# Altium PCB TIDA_010057.PcbDoc (part 5 of 9)
Units mil, origin at the board's own origin, x right, y up, seen from the top; angles counter-clockwise.
Board outline 1771.65 x 3543.31 mil, 12 copper layers (Top Layer, GND1, Signal Layer 1, GND2, POWER1, POWER2, GND4, POWER3, GND6, Signal Layer 2, GND7, Bottom Layer), stack 62.79 mil thick; 593 components, 374 nets, 1805 pads, 1029 vias.
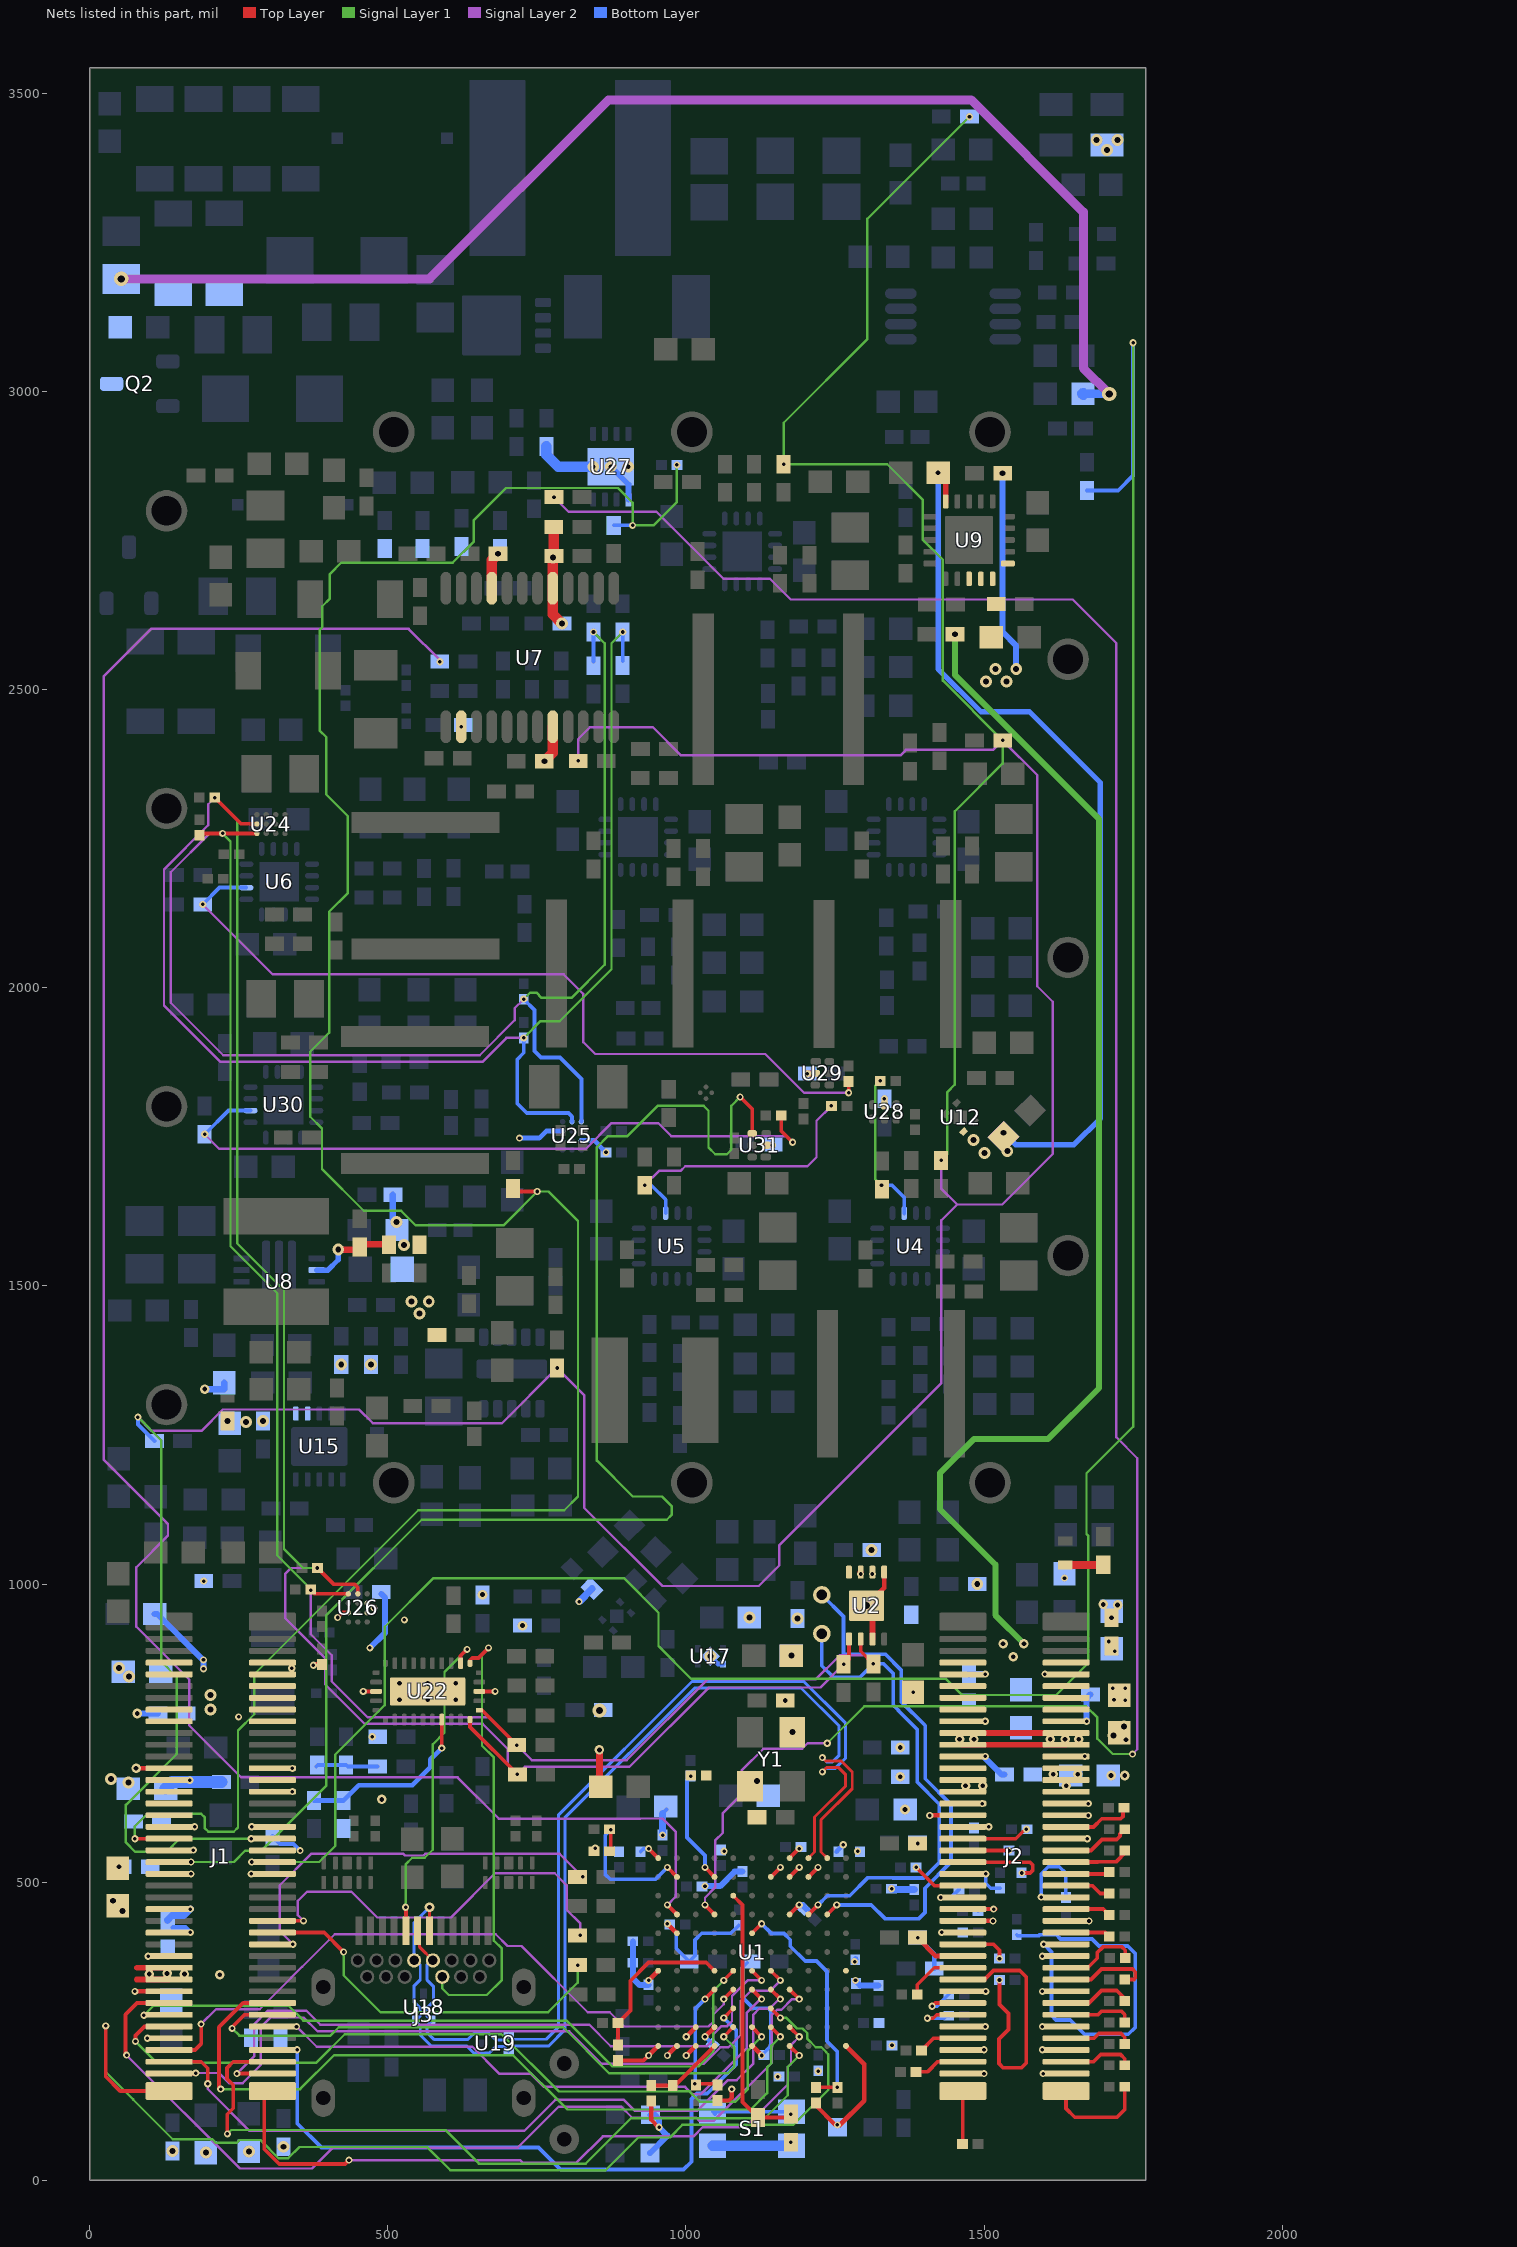
[diagram p13: the nets of this part, all layers, seen from the top]

## Via types
v1: diameter 12, hole 6, Top Layer to Bottom Layer, tented both sides, 424 vias
v2: diameter 20, hole 10, Top Layer to Bottom Layer, tented both sides, 401 vias
v3: diameter 16, hole 8, Top Layer to Bottom Layer, tented both sides, 96 vias
v4: diameter 24, hole 12, Top Layer to Bottom Layer, tented both sides, 28 vias
v5: diameter 20, hole 10, Top Layer to Bottom Layer, 28 vias
v6: diameter 40, hole 20, Top Layer to Bottom Layer, tented both sides, 23 vias
v7: diameter 19.68, hole 7.87, Top Layer to Bottom Layer, 17 vias
v8: diameter 19.68, hole 7.87, Top Layer to Bottom Layer, tented both sides, 10 vias
v9: diameter 32, hole 16, Top Layer to Bottom Layer, tented both sides, 1 vias
v10: diameter 13, hole 6, Top Layer to Bottom Layer, tented both sides, 1 vias

## Nets (pads, with @x,y where several pads share a name; then routed paths per layer and width w, separated by ;. In a path a pad name is that pad's centre, name@x,y a point inside that pad or via, vN(x,y) a via of type N, cw(c..) or ccw(c..) an arc to the next point about the centre after c; other vN are vias at no path point) (continued)
ADDR: (continued)
  Top Layer w6.25: v1(590.62,725) U22.22@590.62,772.76
  Bottom Layer w8: R180.1@376,637.27 R182.1@426,637.27 451.44,662.71 541.36,662.71 571.48,692.83 571.48,705.86 v1(590.62,725)
"ALTERNATE HV INPUT": C122.1 C178.1 R67.1 R71.1 R136.2 U15.1 U15.2
  other v2: 262.2,1272 231,1273.38 291,1273.62 553,1454 540,1474 568.8,1474 1706,3405 1689,3422 1724,3422
AVSS: C29.2 C38.1 C92.1 C93.1 C151.1 C180.1 C185.2 C211.1 C212.1 C213.1 J1.55 J1.56 J1.63 J1.64 J1.65 J1.66 J1.71 J1.72 J1.73 J1.74 J2.49 J2.50 J2.57 J2.58 J2.63 J2.64 J2.69 J2.70 J2.71 J2.72 J2.73 J2.74 L36.2 L37.2 | length 444.5
  Top Layer w8: v3(78,691) 78.18,691.18 J1.55@133.37,691.18
  Bottom Layer w10: v3(80,783) C151.1@114.76,783 ; C38.1@108.99,950 113,950 190,873 v1(191,873) v1(191,858) ; v1(470,893) 470.32,893 495.2,917.88 495.2,977.67 C185.2@489.12,983.75 ; C93.1@1475,848.24 1475.76,849 v1(1502,849) ; v1(1502,711) 1502,708 1529,681 C92.1@1534.38,681 ; v1(1672,770) 1672,808.62 C213.1@1678.38,815
  other v1: 1497,632 1675,632 340,691 1669,711 1502,770 249.97,777.26 1602,849 339,859 1719.38,887.25 1709.51,903.78 191.38,1005 1635,1010
  other v2: 65,667 36,673
CC1: J3.A5 U22.2 | length 556.2
  Top Layer w6.25: J3.A5@530.47,418.54 v1@530.47,459.53 ; U22.2@622.12,867.24 622.12,879.68 v1(633,890.56)
  Signal Layer 1 w4: v1(530,458) 530,530 541.2,541.2 562,541.2 575.42,554.62 575.42,731.3 595.2,751.08 595.2,852.76 v1(633,890.56)
CC2: J3.B5 U22.1 | length 754.2
  Top Layer w6.25: U22.1@637.87,867.24 637.87,872.34 641.63,876.1 652.1,876.1 v1(669,893)
  Signal Layer 1 w4: J3.B5@591.5,341.37 591.5,321.71 602.21,311 666,311 691.34,336.34 691.34,388.66 678,402 678,709 658,729 658,882 v1(669,893)
CDCE_S0: R81.1 U1.D2 | length 3524.8
  Top Layer w6.25: v1(969,462.01) U1.D2@985.02,445.99
  Signal Layer 2 w4: v1(587.38,2547) 587.38,2549.62 535,2602 103,2602 24,2523 24,1208.34 131.43,1100.92 131.43,1081.36 78.2,1028.13 78.2,928.8 167,840 167,763 254.2,675.8 617.2,675.8 686.2,606.8 923.8,606.8 924,607 960.8,607 982.8,585 982.8,475.81 v1(969,462.01)
CDCE_VCTRL: R154.1 U1.D4 | length 3953.1
  Top Layer w6.25: v1(1031.99,462.01) U1.D4@1048.01,445.99
  Signal Layer 1 w4: v1(1237,733) 1299,795 1671.5,795 1690.2,776.3 1690.2,740.8 1716,715 v1(1749,715)
  Signal Layer 2 w4: v1(778.76,2823) 803.39,2798.37 950.63,2798.37 1063,2686 1141,2686 1175.8,2651.2 1648.8,2651.2 1722,2578 1722,1246.2 1757,1211.2 1757,723 v1(1749,715) ; v1(1031.99,462.01) 1031.99,473.99 1049,491 1049,570 1062,583 1062,616 1094,648 1094,688 1130,724 1195,724 1204,733 v1(1237,733)
CLKIN_FX3: J1.30 R10.1 | length 697
  Top Layer w6.25: J1.30@306.6,435.27 v1(358.73,435.27)
  Signal Layer 2 w4: v1(358.73,435.27) 349.34,444.66 349.34,468.83 364.6,484.09 439.2,484.09 482.5,440.8 605.8,440.8 680,515 780,515 800,495 800,454 823,431 v1(823,411)
DC_DC_CLK1: C78.2 J1.43 R75.2 R120.2 | length 4117.8
  Top Layer w6.25: v1(76,573) 133.3,573 J1.43@133.37,573.07 ; R120.2@709.88,1663.4 714.83,1658.45 v1(750.77,1658.45)
  Signal Layer 1 w4: v1(76,573) 76,594 97,615 187,615 192.8,609.2 192.8,591.2 199.2,584.8 241.8,584.8 248.8,591.8 248.8,754.59 276,781.79 276,848.85 551.15,1124 796,1124 819,1147 819,1609.15 769.7,1658.45 v1(750.77,1658.45) 694,1601.68 546.97,1601.68 522.45,1626.2 459.8,1626.2 389.8,1696.2 389.8,1764 370,1783.8 370,1893 402,1925 402,2128 433.2,2159.2 433.2,2287.8 396.8,2324.2 396.8,2420.5 385.8,2431.5 385.8,2600 390.2,2604.4 390.2,2640.04 403,2652.84 403,2694 421.8,2712.8 608.8,2712.8 644,2748 644,2783.84 698.36,2838.2 886.02,2838.2 910.62,2813.6 v1(910.62,2775.62) 945.62,2775.62 984.99,2814.99 v1(984.99,2877)
  Bottom Layer w6.25: R75.2@879,2775.62 v1(910.62,2775.62)
DIR: R147.1 R148.2 R174.1 | length 105.3
  Bottom Layer w6.25: R174.1@379.91,694.2 382.47,696.76 R147.1@430,696.76 432.76,694 R148.2@483,694
DM: J3.A7 J3.B7 U1.A10 U18.2 U19.2 | length 1810.7
  Top Layer w5: J3.A7@569.84,418.54 569.84,457.84 v3(570,458) ; v1(1229,709) 1234.95,703.05 1260.95,703.05 1279,685 1279,657 1226.74,604.74 1226.74,550.73 U1.A10@1236.98,540.48
  Bottom Layer w5: v3(570,458) 544.25,432.25 J3.B7@544.25,368.93 546.57,368.93 554.5,361 554.5,336.57 543.63,325.7 543.63,299.58 554.5,288.7 554.5,275.64 U18.2@546.22,267.36 554.5,259.08 554.5,243.94 573.44,225 632.93,225 644.3,213.63 670.42,213.63 681.3,224.5 694.36,224.5 U19.2@702.64,216.22 712.12,225.7 770.26,225.7 797,252.44 797,608 1014.8,825.8 1193.2,825.8 1257,762 1257,713 1246,702 1236,702 v1(1229,709)
DP: J3.A6 J3.B6 U1.A9 U18.1 U19.1 | length 1730.2
  Top Layer w5: J3.A6@550.16,418.54 553.56,415.13 553.56,391.11 J3.B6@575.75,368.93 ; U1.A9@1205.49,540.48 1215.74,550.73 1215.74,609.29 1268,661.56 1268,680.44 1256.39,692.05 1235.93,692.05 v1(1229,685.12)
  Bottom Layer w5: J3.B6@575.75,368.93 573.43,368.93 565.5,361 565.5,336.57 576.37,325.7 576.37,299.58 565.5,288.7 565.5,275.64 U18.1@573.78,267.36 565.5,259.08 565.5,248.5 578,236 633.93,236 644.3,246.37 670.42,246.37 681.3,235.5 694.36,235.5 U19.1@702.64,243.78 709.72,236.7 765.7,236.7 786,257 786,612.56 1010.24,836.8 1197.76,836.8 1263.8,770.76 1268,766.56 1268,708.44 1250.56,691 1235,691 1229.12,685.12 v1(1229,685.12)
FPGA_PG_1V: R95.1 R124.2 U30.14 | length 1173.6
  Top Layer w6.25: R95.1@1160,1786 1160,1760 v1(1179,1741)
  Signal Layer 2 w4: v1(193,1754.38) 217.38,1730 832,1730 875.2,1773.2 953.66,1773.2 975.66,1751.2 1168.8,1751.2 v1(1179,1741)
  Bottom Layer w6.25: v1(193,1754.38) 232.78,1794.16 U30.14@269.88,1794.16
FPGA_PG_2V5: R66.2 R234.1 U6.14 | length 1365.5
  Top Layer w6.25: v1(1273,1824) R234.1@1273,1843.01
  Signal Layer 2 w4: v1(189.62,2140) 306.82,2022.8 795,2022.8 828,1989.8 828,1909 848,1889 1133,1889 1198,1824 v1(1273,1824)
  Bottom Layer w6.25: v1(189.62,2140) 217.78,2168.16 U6.14@262.88,2168.16
FX3_A0: J1.7 U1.H5 | length 1147.9
  Top Layer w6.25: J1.7@133.37,218.73 176.79,218.73 187,228.95 v1(187,262) ; v1(1063.49,303.99) U1.H5@1079.5,320.01
  Signal Layer 2 w4: v1(187,262) 212,287 285.32,287 338.2,339.88 338.2,340.2 356.4,358.4 356.57,358.4 410.97,412.8 681.2,412.8 701,393 724.5,393 835.5,282 872.41,282 896.41,258 1038,258 1045.79,265.79 1045.79,277.79 1063.49,295.49 v1(1063.49,303.99)
FX3_A1: J1.8 U1.J5 | length 1135.8
  Top Layer w6.25: v1(1063.49,272.5) U1.J5@1079.5,288.51
  Bottom Layer w6.25: v1(348,219) 348,96 389,55 752.97,55 789.85,18.12 996.12,18.12 1009.33,31.33 1009.33,136.33 1018.67,145.67 1035.67,145.67 1084.66,194.66 1084.66,251.32 v1(1063.49,272.5)
FX3_CLK: J2.46 R199.2 | length 116.3
  Top Layer w6.25: J2.46@1637.65,592.75 1683.53,592.75 1697.39,606.61 1729.36,606.61 1732.99,610.24 R199.2@1732.99,624
FX3_CTL15: J1.6 U1.L8 | length 1310
  Top Layer w6.25: v1(231,78) 231,111 241,121 241,160 230.45,170.55 230.45,188.45 241.05,199.05 J1.6@306.6,199.05 ; U1.L8@1173.99,225.52 v1(1190.01,209.5)
  Signal Layer 1 w4: v1(231,78) 237.42,84.42 596.58,84.42 652.8,28.2 832,28.2 908,104.2 1132.2,104.2 1170.8,142.8 1170.8,190.3 v1(1190.01,209.5)
FX3_D0: J2.1 R122.2 | length 89
  Top Layer w6.25: R122.2@1464.01,61 1464.43,61.42 J2.1@1464.43,149.84
FX3_D1: J2.2 R192.2 | length 177.2
  Top Layer w6.25: J2.2@1637.65,149.84 1637.65,120.35 1652,106 1723,106 1736,119 R192.2@1736,157
FX3_D2: J2.5 R117.2 | length 85.5
  Top Layer w6.25: R117.2@1385.99,182 1405,182 1422.05,199.05 J2.5@1464.43,199.05
FX3_D3: J2.6 R169.2 | length 117.2
  Top Layer w6.25: J2.6@1637.65,199.05 1683.77,199.05 1695.72,211 1729,211 1735.99,204.01 R169.2@1736,193
FX3_D4: J2.9 R130.2 | length 77.9
  Top Layer w6.25: R130.2@1394.99,218 1415.41,238.42 J2.9@1464.43,238.42
FX3_D5: J2.10 R194.2 | length 115.3
  Top Layer w6.25: J2.10@1637.65,238.42 1684.42,238.42 1692.39,246.39 1729.61,246.39 1735.99,240.01 R194.2@1735.99,229
FX3_D6: J2.13 R155.2 | length 101
  Top Layer w6.25: v1(1405,272) 1415,272 1420.79,277.79 J2.13@1464.43,277.79
  Bottom Layer w6.25: v1(1405,272) 1433.43,272 1439.22,277.79 R155.2@1441.01,276
FX3_D7: J2.14 R193.2 | length 116.1
  Top Layer w6.25: J2.14@1637.65,277.79 1691.36,277.79 1697.17,283.61 1730.39,283.61 1735.99,278.01 R193.2@1735.99,265
FX3_D8: J2.15 R150.2 | length 90
  Top Layer w6.25: v1(1413,292) 1418.47,297.47 J2.15@1464.43,297.47
  Bottom Layer w6.25: v1(1413,292) 1421.01,292 R150.2@1441.01,312
FX3_D9: J2.16 R196.2 | length 116.5
  Top Layer w6.25: J2.16@1637.65,297.47 1676.26,297.47 1697.17,318.39 1722.56,318.39 1735.99,304.96 R196.2@1735.99,301
FX3_D10: J2.19 R149.2 | length 467.8
  Top Layer w6.25: J2.19@1464.43,336.84 1500.84,336.84 1516,352 1560,352 1571,341 1571,197 1563,189 1531.8,189 1525,195.8 1525,237 1541,253 1541,280 1526.01,294.99 v1(1526.01,336) v1@1525.16,336.84
FX3_D11: J2.20 R197.2 | length 154.3
  Top Layer w6.25: J2.20@1637.65,336.84 1679.63,336.84 1697.17,354.39 1749.14,354.39 1753.53,350 1753.53,339 1751.53,337 R197.2@1735.99,337
FX3_D12: J2.21 R189.2 | length 104.2
  Top Layer w6.25: R189.2@1388,312 1388,328 1416.53,356.53 J2.21@1464.43,356.53
FX3_D13: J2.22 R125.2 | length 134.9
  Top Layer w6.25: J2.22@1637.65,356.53 1674.01,356.53 1690,372.52 1690,382.22 1699.39,391.61 1731.39,391.61 1736.99,386.01 R125.2@1736.99,373
FX3_D14: J2.25 R156.2 | length 79.6
  Top Layer w6.25: J2.25@1464.43,395.9 1516,395.9 1526.01,385.89 v1(1526.01,372)
FX3_D15: J2.26 R243.2 | length 658
  Top Layer w6.25: v1(1600,396) 1600.1,395.9 J2.26@1637.65,395.9 J2.26@1637.55,396
  Bottom Layer w6.25: R243.2@1555,412.01 1556.93,410.08 1591.18,410.08 1593.11,412.01 1620.99,412.01 1628.05,404.95 1681.05,404.95 1693,393 1741,393 1753.53,380.47 1753.53,256.53 1742,245 1668.6,245 1644.7,268.9 1620.9,268.9 1613,276.8 1613,383 v1(1600,396)
FX3_D16: J2.27 R198.2 | length 76.2
  Top Layer w6.25: v1(1429,416) 1428,416 1427.58,415.58 J2.27@1464.43,415.58 J2.27@1464.84,416
  Bottom Layer w6.25: v1@1427.58,415.58 1428,416 v1(1429,416) 1429.42,415.58 R198.2@1464.43,415.58
FX3_D17: J2.28 R244.2 | length 75.1
  Top Layer w6.25: J2.28@1637.65,415.58 1703.42,415.58 R244.2@1710.01,409
FX3_D18: J2.31 R228.2 | length 81.9
  Top Layer w6.25: J2.31@1464.43,454.95 v1(1516,454.95) v1@1519.08,454.95
  Bottom Layer w6.25: R228.2@1489.99,452 1492.95,454.95 v1(1516,454.95)
FX3_D19: J2.32 R227.2 | length 76.5
  Top Layer w6.25: J2.32@1637.65,454.95 1700.05,454.95 R227.2@1710.01,445
FX3_D20: J2.33 R224.2 | length 36.3
  Bottom Layer w6.25: v1(1427.36,474.36) 1444.37,474.36 R224.2@1458.01,488
FX3_D21: J2.34 R217.2 | length 171.8
  Top Layer w6.25: v1(1596,475) 1637.29,475 J2.34@1637.65,474.64
  Bottom Layer w6.25: v1(1596,475) 1596,514 1607.86,525.86 1626.14,525.86 1637.29,514.71 1637.29,475 R217.2@1637.65,474.64
FX3_D22: J2.35 R220.2 | length 91.1
  Top Layer w6.25: v1(1385.99,525) 1416.67,494.33 J2.35@1464.43,494.33
FX3_D23: J2.36 R216.2 | length 77.9
  Top Layer w6.25: J2.36@1637.65,494.33 1681.67,494.33 1695,481 R216.2@1710.01,481
FX3_D24: J2.37 R223.2 | length 43.2
  Bottom Layer w6.25: v1(1503,514) 1503,498.17 1511.16,490.01 R223.2@1527,490.01
FX3_D25: J2.38 R218.2 | length 73.6
  Top Layer w6.25: J2.38@1637.65,514.01 1707.02,514.01 R218.2@1710.01,517
FX3_D26: J2.39 R226.2 | length 148.5
  Top Layer w6.25: J2.39@1464.43,533.7 1577.3,533.7 1581.5,529.5 1581.5,519.5 1577.49,515.49 v1(1563.5,515.49)
FX3_D27: J2.40 R219.2 | length 163.7
  Top Layer w6.25: 1690.7,533.7 J2.40@1637.65,533.7 1637.65,534.19 1721.2,534.19 1738,550.99 R219.2@1735.99,553
FX3_D28: J2.41 R222.2 | length 77.7
  Top Layer w6.25: J2.41@1464.43,553.38 1541.63,553.38 v1(1542.01,553)
FX3_D29: J2.42 R221.2 | length 115.4
  Top Layer w6.25: J2.42@1637.65,553.38 1679.38,553.38 1697.81,571.81 1722.76,571.81 1727.99,577.04 1727.99,581 R221.2@1735.99,589
FX3_D30: J2.43 R225.2 | length 113.2
  Top Layer w6.25: J2.43@1464.43,573.07 1553.06,573.07 1568.99,589 v1(1571,589)
FX3_D31: J2.45 R240.2 | length 69.5
  Top Layer w6.25: J2.45@1464.43,592.75 1507.75,592.75 v1(1508,593)
  Bottom Layer w6.25: R240.2@1483,590.99 1485.01,593 v1(1508,593)
FX3_FLAGA: J1.3 U1.G7 | length 1261.3
  Top Layer w6.25: J1.3@133.37,179.36 177.36,179.36 v1(178,180) ; U1.G7@1142.5,351.5 v1(1158.51,335.49)
  Signal Layer 2 w4: v1(178,180) 217,180 234,163 256.5,163 287,193.5 287,257 303.2,273.2 358.96,273.2 382.16,250 804.2,250 858.5,195.7 1030.17,195.7 1057.77,223.3 1071.3,223.3 1092,244 1092,301 1108.79,317.79 1140.82,317.79 v1(1158.51,335.49)
FX3_FLAGB: J1.4 U1.G6 | length 1194.4
  Top Layer w6.25: v1(247,179) 306.23,179 J1.4@306.6,179.36 v1@250.64,179.36 ; U1.G6@1111,351.5 v1(1127.02,335.49)
  Signal Layer 2 w4: v1(247,179) 275.8,207.8 275.8,261.64 298.56,284.4 363.6,284.4 386.8,261.2 837.8,261.2 874,225 1035.51,225 1045.79,235.28 1045.79,244.79 1059.7,258.7 1069.2,258.7 1077.29,266.78 1077.29,309.29 1103.49,335.49 v1(1127.02,335.49)
FX3_FSLC0: R18.1 R27.2 U1.B2 | length 248.1
  Top Layer w6.25: R27.2@873.99,557 v1(873.99,588) ; v1(969,525) U1.B2@985.02,508.98
  Bottom Layer w6.25: v1(873.99,588) 864.88,578.89 864.88,513.12 873,505 949,505 v1(969,525)
FX3_FSLC1: R19.1 R28.2 U1.B4 | length 190.7
  Top Layer w6.25: v1(1031.99,525) U1.B4@1048.01,508.98
  Bottom Layer w6.25: v1(1008,677.99) 1001.77,671.76 1001.77,575.23 1031.99,545.01 v1(1031.99,525)
FX3_FSLC2: R20.1 R29.2 U1.E6 | length 409.3
  Top Layer w6.25: U1.E6@1111,414.5 v1(1127.02,430.51) ; R29.2@1218,155.99 v1(1254,155.99)
  Bottom Layer w6.25: v1(1127.02,430.51) 1143.51,414.02 1164.62,414.02 1175.08,403.55 1175.08,392.83 1200.01,367.91 1219.09,367.91 1236.68,350.32 1236.68,233.32 1254,216 v1(1254,155.99)
FX3_GPO0: J1.11 U1.K6 | length 1310.4
  Top Layer w6.25: v1(77,233) 77,243 92.1,258.1 J1.11@133.37,258.1 ; U1.K6@1111,257.02 v1(1127.02,241)
  Signal Layer 1 w4: v1(77,233) 113,197 379.8,197 428,245.2 690.8,245.2 787,149 986.5,149 986.71,149.21 1006.29,149.21 1023.5,132 1083,132 1104,153 1104,217.98 v1(1127.02,241)
FX3_GPO1: J1.13 U1.G5 | length 1206.3
  Top Layer w6.25: v1(91,277) 91.79,277.79 J1.13@133.37,277.79 ; v1(1063.49,335.49) U1.G5@1079.5,351.5
  Signal Layer 1 w4: v1(91,277) 107,293 333.5,293 358.5,268 800,268 877,191 1021,191 1045.79,215.79 1045.79,317.79 v1(1063.49,335.49)
FX3_GPO2: J1.12 U1.H6 | length 950.3
  Top Layer w6.25: U1.H6@1111,320.01 v1(1127.02,303.99)
  Signal Layer 2 w4: v1(347,258) 381,224 641.87,224 687.34,178.52 740.07,178.52 761.8,156.8 998.7,156.8 1010.7,144.79 1025.3,144.79 1101.8,221.3 1101.8,280.66 1125.14,303.99 v1(1127.02,303.99)
FX3_GPO3: J1.14 U1.K5 | length 1048.1
  Top Layer w6.25: v1(239,255) 239,257 259.79,277.79 J1.14@306.6,277.79 ; v1(1063.49,241) U1.K5@1079.5,257.02
  Signal Layer 1 w4: v1(239,255) 251.2,242.8 403.8,242.8 417.8,256.8 794.2,256.8 871.2,179.8 1070.8,179.8 1081,190 1081,223.49 v1(1063.49,241)
FX3_I2C_SCL: R12.1 R77.1 R157.1 R177.2 R185.1 R233.1 R237.1 SCL.1 U1.D9 U2.6 U22.26 U24.A1 U25.A1 U26.A1 | length 5702
  Top Layer w6.25: R185.1@184,2256.01 186.99,2259 v1(223,2259) U24.A1@280.5,2259 ; v1(371,990) 377.25,983.75 U26.A1@434,983.75 ; U22.26@653.61,788.5 657.87,788.5 v1(716.38,730) ; U1.D9@1205.49,445.99 v1(1221.5,462.01) ; U2.6@1293.16,907.9 1293.16,887.59 v1(1314.5,866.24)
  Signal Layer 1 w4: v1(223,2259) 236.3,2245.7 236.3,1566.7 314.8,1488.2 314.8,1048.2 371,992 v1(371,990) ; v1(728,1981.01) 738.99,1992 749.2,1992 758,1983.2 808.2,1983.2 864,2039 864,2577.76 v1(845,2596.76)
  Signal Layer 2 w4: v1(223,2259) 201,2259 136,2194 136,1975 224,1887 654.16,1887 712.8,1945.64 712.8,1965.81 v1(728,1981.01) ; v1(371,990) 371,915.87 406.2,880.64 406.2,836.8 466.15,776.85 669.52,776.85 v1(716.38,730) 741.58,704.8 900.8,704.8 1036,840 1217.38,840 1258.2,880.82 1299.92,880.82 v1(1314.5,866.24)
  Bottom Layer w6.25: v1(728,1981.01) 746,1963.01 746,1894 757,1883 789,1883 824.75,1847.25 U25.A1@824.75,1775.5 ; R157.1@845,2547.24 v1(845,2596.76) ; v1(1221.5,462.01) 1236.98,477.49 1274.86,477.49 1304.69,507.32 1346.76,507.32 1346.97,507.11 1399.03,507.11 1425.05,533.13 1425.05,630.95 1388,668 1388,756.27 1356.14,788.14 ; SCL.1@1228,917 1228,863 1247,844 1292.26,844 v1(1314.5,866.24) 1331.76,866.24 1347.55,850.45 1347.55,797.54 1356.54,788.54
FX3_I2C_SDA: R13.1 R78.1 R158.1 R178.2 R186.1 R232.1 R236.1 SDA.1 U1.D10 U2.5 U22.25 U24.A2 U25.A2 U26.A2 | length 5992.6
  Top Layer w6.25: v1(210,2319) 253.67,2275.32 279.93,2275.32 U24.A2@280.5,2274.75 U24.A2@280.5,2275.32 ; v1(382,1027) 409,1000 444,1000 449.75,994.25 U26.A2@449.75,983.75 ; U22.25@637.87,772.76 637.87,760.51 v1(717.38,681) ; U1.D10@1236.98,445.99 v1(1253,462.01) ; v1(1264.5,865.62) 1273.47,874.59 U2.5@1273.47,907.9
  Signal Layer 1 w4: v1(210,2319) 247.5,2281.5 247.5,1571.34 326,1492.84 326,1059 358,1027 v1(382,1027) ; v1(728,1916) 756.2,1944.2 788.35,1944.2 875.2,2031.05 875.2,2577.96 v1(894,2596.76)
  Signal Layer 2 w4: v1(210,2319) 199,2308 199,2272.84 124.8,2198.64 124.8,1970.36 219.36,1875.8 658.8,1875.8 699,1916 v1(728,1916) ; v1(382,1027) 338,1027 327.8,1016.8 327.8,943.2 395,876 395,832.16 461.51,765.65 659.23,765.65 701,723.88 701,697.38 v1(717.38,681) 729.98,693.6 905.44,693.6 1038.49,826.65 1225.53,826.65 v1(1264.5,865.62)
  Bottom Layer w6.25: v1(728,1916) 728,1891 717,1880 717,1806 733,1790 803,1790 809,1784 U25.A2@809,1775.5 ; R158.1@894,2547.62 v1(894,2596.76) ; SDA.1@1228,982 1264.5,945.5 1264.5,881 ; v1(1253,462.01) 1310.99,462.01 1334,439 1390.93,439 1401,449.07 1401,490.05 1444.74,533.79 1444.74,630.28 1401.45,673.57 1401.45,762.66 1361,803.11 1361,856.02 1334.45,882.57 1266.07,882.57 1264.5,881 ; v1(1264.5,865.62) 1264.5,881
FX3_INITB: J1.28 R16.2 | length 640
  Top Layer w6.25: J1.28@306.6,415.58 393.42,415.58 v1(426,383)
  Signal Layer 1 w4: v1(426,383) 426,344 488,282 769,282 818.38,331.38 v1(818.38,361)
FX3_PG_1V2: R46.2 R167.1 U4.14 | length 256.1
  Signal Layer 1 w4: v1(1326.01,1844) 1317.8,1835.79 1317.8,1679.08 v1(1328,1668.88)
  Bottom Layer w6.25: v1(1328,1668.88) 1345.62,1668.88 1366.16,1648.35 U4.14@1366.16,1622.12 U4.14@1366.16,1621.62
FX3_PG_1V8: R53.2 R172.1 U5.14 | length 471.8
  Signal Layer 2 w4: v1(931,1668.88) 955.12,1693 990.87,1693 998.8,1700.93 1203.93,1700.93 1219,1716 1219,1777 v1(1244,1802)
  Bottom Layer w6.25: v1(931,1668.88) 941.88,1668.88 942,1669 966.16,1644.84 U5.14@966.16,1622.12
FX3_PKTEND: J1.15 U1.H8 | length 1563.9
  Top Layer w6.25: v1(62,210) 60,212 60,278 79.47,297.47 J1.15@133.37,297.47 ; U1.H8@1173.99,320.01 v1(1190.01,303.99)
  Signal Layer 2 w4: v1(62,210) 252,20 373,20 408,55 718,55 786.8,123.8 891.36,123.8 910.16,105 1017.4,105 1022.2,100.2 1047.08,100.2 1144,197.12 1144,277.5 1152.8,286.3 1160.33,286.3 1178.03,303.99 v1(1190.01,303.99)
FX3_PMODE0: R21.1 R30.2 U1.G4 | length 276.1
  Top Layer w6.25: R30.2@886,226.99 R21.1@885.99,264 907,285.01 907,334.98 937.37,365.35 959.26,365.35 959.31,365.3 979.23,365.3 979.28,365.35 990.75,365.35 990.8,365.3 1010.73,365.3 1010.78,365.35 1034.16,365.35 U1.G4@1048.01,351.5
FX3_PMODE1: R22.1 R31.2 U1.H4 | length 211.5
  Top Layer w6.25: v1(1015,162) 1050.99,162 R31.2@1053,159.99 ; v1(1031.99,303.99) U1.H4@1048.01,320.01
  Bottom Layer w6.25: v1(1015,162) 1015.48,161.51 1015.5,287.5 v1(1031.99,303.99)
FX3_PMODE2: R23.1 R32.2 U1.L4 | length 133.2
  Top Layer w6.25: R32.2@942,158.99 R23.1@978,158.99 ; R23.1@978,159.99 982.48,159.99 U1.L4@1048.01,225.52
FX3_PRGB: J1.26 R24.2 | length 656.6
  Signal Layer 2 w4: v1(341,396) 318.8,418.2 318.8,495.06 371.37,547.64 526.21,547.64 529.05,544.8 559.95,544.8 562.79,547.64 788.36,547.64 v1(827,509)
FX3_RST: C3.1 R8.1 S1.2 S1.4 U1.C5 | length 576.6
  Top Layer w6.25: U1.C5@1079.5,477.49 1095,461.99 1095,131.38 R8.1@1121,105.38 C3.1@1170.16,105.38
  Bottom Layer w6.25: S1.2@1048.92,111.17 S1.2@1045,115.09 1172.02,115.09 v10(1175.94,111.17)
FX3_SLCS: J1.2 U1.K8 | length 1160.7
  Top Layer w6.25: J1.2@306.6,149.84 292.91,136.15 292.91,52.47 317.86,27.53 428.53,27.53 v1(435,34) ; U1.K8@1173.99,257.02 v1(1190.01,241)
  Signal Layer 2 w4: v1(435,34) 721.8,34 726,29.8 816.8,29.8 860.8,73.8 1012.8,73.8 1028,89 1099,89 1170.8,160.8 1170.8,189.8 1176.21,195.21 1176.21,227.2 v1(1190.01,241)
FX3_SLOE: J1.1 U1.J7 | length 1828.4
  Top Layer w6.25: v1(27,259) 27,174 51.16,149.84 J1.1@133.37,149.84 ; U1.J7@1142.5,288.51 v1(1158.51,272.5)
  Signal Layer 1 w4: v1(27,259) 27,182 73.2,135.8 73.2,135.27 139.47,69 206,69 212.2,62.8 246.8,62.8 251.7,67.7 286.52,67.7 317.05,37.18 332.95,37.18 351.77,56 566,56 605,17 865,17 920,72 973.5,72 984.2,82.7 984.2,83.2 994,93 1179.98,93 1238.8,151.82 1238.8,210.94 1239,211.14 1235.3,214.84 1235.3,215.22 1227.22,223.3 1217.7,223.3 1203.81,237.2 1203.81,246.72 1195.72,254.8 1186.21,254.8 1168.51,272.5 v1(1158.51,272.5)
FX3_SLRD: J1.5 U1.H7 | length 1270.8
  Top Layer w6.25: J1.5@133.37,199.05 187.05,199.05 198,188.1 v1(198,162) ; U1.H7@1142.5,320.01 v1(1158.51,303.99)
  Signal Layer 2 w4: v1(198,162) 198,153.34 268.34,83 729,83 781,135 896,135 914,117 1019.5,117 1070.7,168.2 1085.42,168.2 1113.22,196 1113.22,278.21 1123,288 1140.64,288 1156.63,303.99 v1(1158.51,303.99)
FX3_SLWR: J1.16 U1.K7 | length 1327.2
  Top Layer w6.25: v1(220,153) 217,156 217,257.04 257.43,297.47 J1.16@306.6,297.47 ; U1.K7@1142.5,257.02 v1(1158.51,241)
  Signal Layer 1 w4: v1(220,153) 353,153 410,210 710.16,210 801.36,118.8 1108.67,118.8 1136.2,146.33 1136.2,189.32 1143.31,196.43 1143.31,225.8 v1(1158.51,241)
"GLOBAL ENABLE": J1.44 R47.1 R63.1 R92.1 R109.1 R245.1 R246.2 R247.2 | length 7178.2
  Signal Layer 1 w4: v1(81,1280) 120,1241 120,870 146.2,843.8 146.2,715.2 60.8,629.8 60.8,566.7 76.5,551 129,551 151,573 v1(271,573) ; v1(1428,1710.62) 1438.65,1721.27 1438.65,1825.34 1451,1837.69 1451,2295.85 1531.24,2376.09 v1(1531.24,2415) 1431,2515.24 1431,2718 1397,2752 1397,2819 1337.76,2878.24 v1(1164,2878.24) 1164,2947.73 1304.38,3088.11 1304.38,3289.76 v1(1475.62,3461)
  Signal Layer 2 w4: v1(81,1280) 104.04,1256.96 187.43,1256.96 223.29,1292.82 452.03,1292.82 475.05,1269.8 691.42,1269.8 v1(784,1362.38) 829.31,1317.07 829.31,1128.06 960.57,996.8 1122.16,996.8 1156.86,1031.5 1156.86,1065.58 1428.56,1337.27 1428.56,1610.24 1454.98,1636.66 ; v1(819.36,2380.52) 819.36,2417.36 839,2437 944.84,2437 992.04,2389.8 1359.8,2389.8 1369,2399 1515.24,2399 v1(1531.24,2415) 1589.2,2357.04 1589.2,2182.05 1589.13,2181.98 1589.13,2002.58 1615.16,1976.55 1615.16,1721.26 1530.57,1636.66 1454.98,1636.66 ; v1(1428,1710.62) 1428,1663.64 1454.98,1636.66
  Bottom Layer w6.25: v1(81,1280) 81,1267.76 R246.2@108.76,1240
GND_A7: C119.2 C182.1 C183.2 C184.2 D17.2 R139.2 R141.1 R142.1 R165.2 U8.2 | length 241.3
  Top Layer w11: v2(417,1561) 444.38,1561 453,1569.62 501.38,1569.62 C183.2@502,1569
  Bottom Layer w9: U8.2@380.66,1526.69 399.69,1526.69 417,1544 v2(417,1561)
  Bottom Layer w11: v3(193,1327) 226,1327 C119.2@226,1337.5 ; D17.2@508.65,1653 508.65,1612.84 v2(514.5,1607)
  other v2: 422,1368.38 472,1368.38 527,1569
GND_SIG: C1.2 C2.2 C3.2 C4.2 C5.2 C6.2 C7.2 C8.2 C9.2 C10.2 C11.2 C12.2 C13.2 C14.2 C15.2 C16.2 C17.2 C18.2 C19.2 C20.1 C21.1 C40.1 C49.2 C52.1 C53.1 C55.1 C73.2 C74.1 C77.2 C91.1 C112.1 C115.2 C123.1 C133.2 C138.2 C139.1 C140.2 C141.2 C142.2 C143.2 C144.2 C145.2 C146.2 C147.2 C148.2 C149.2 C150.2 C152.2 C154.2 C162.1 C163.1 C164.2 C165.2 C166.2 C167.2 C168.2 C169.2 C170.2 C172.2 C173.2 C174.2 C204.2 C205.2 C209.1 C210.1 C211.2 C212.2 C234.2 C235.2 C236.2 C242.2 D1.2 D2.2 D9.2 J1.9 J1.17 J1.23 J1.27 J1.31 J1.37 J1.38 J1.41 J1.42 J1.45 J1.46 J1.51 J1.52 J1.53 J1.54 J2.3 J2.4 J2.7 J2.8 J2.11 J2.12 J2.17 J2.18 J2.23 J2.24 J2.29 J2.30 J2.44 J2.47 J2.48 L36.1 L37.1 L38.2 L39.2 R1.1 R2.1 R3.1 R4.1 R5.1 R6.1 R7.2 R9.1 R11.1 R27.1 R28.1 R29.1 R30.1 R31.1 R32.1 R162.2 R170.1 R176.2 R182.2 S1.1 S1.3 U1.A1 U1.A8 U1.B7 U1.B8 U1.B9 U1.D8 U1.E2 U1.G1 U1.G11 U1.K3 U1.K4 U1.L1 U1.L2 U1.L3 U1.L6 U1.L11 U2.1 U2.2 U2.3 U2.4 U2.7 U2.9@1303,964 U7.5 U7.9 U7.14 U7.20 U17.2 U17.5 U22.13 U22.28 U22.31 U25.B3 U25.C1 U26.B3 U26.C1 U26.C3 U27.5 U27.9 U28.2 U29.2 U31.2 Y1.2 Y1.4 | length 3335.1
  Top Layer w6: R30.1@886,201.01 929.01,201.01 v1(937.5,209.5)
  Top Layer w7: v1(76,317) 76.16,317.16 J1.17@133.37,317.16 ; J1.45@133.37,592.75 175.75,592.75 v1(176,593) v1@178.5,593 ; J1.53@133.37,671.49 158.51,671.49 J1.53@159,671 ; J1.54@321,671.49 J1.54@321.51,672 ; v1(416,944) 424.25,952.25 U26.C1@434,952.25 ; v1(459,820) U22.13@480.39,820 U22.13@483.39,820 ; U22.28@653.61,820 v1(680,820) ; v1(937.5,556.5) U1.A1@953.52,540.48 ; R32.1@942,133.01 942,101 954,89 v1(955,89) ; R31.1@1053,134.01 1072.01,134.01 1077,139 v1(1077,153) ; U1.B7@1142.5,508.98 v1(1158.51,525) ; U1.D8@1173.99,445.99 v1(1190.01,462.01) ; U1.B8@1173.99,508.98 v1(1190.01,525) ; U1.A8@1173.99,540.48 v1(1190.01,556.5) ; U1.B9@1205.49,508.98 v1(1221.5,525) ; R29.1@1218,130.01 1218,125.47 1250.47,93 v1(1254,93)
  Top Layer w8: v1(375.25,864) 376.25,865 C154.2@390,865 ; v1(937.5,209.5) U1.L1@953.52,225.52 ; v1(937.5,335.49) U1.G1@953.52,351.5 ; v1(969,209.5) U1.L2@985.02,225.52 ; v1(969,430.51) U1.E2@985.02,414.5 ; v1(1000.5,209.5) U1.L3@1016.51,225.52 ; v1(1000.5,241) U1.K3@1016.51,257.02 ; v1(1031.99,241) U1.K4@1048.01,257.02 ; U1.L6@1111,225.52 v1(1127.02,209.5) ; v1(1254,93) 1258.47,93 1299,133.53 1299,195 U1.L11@1268.48,225.52 ; v4(1303,964) 1332.53,993.53 U2.1@1332.53,1020.1 ; v1(1388.62,407) 1419.41,376.21 J2.23@1464.43,376.21 ; v1(1409,612) 1409.44,612.44 J2.47@1464.43,612.44 ; J2.29@1464.43,435.27 1515.27,435.27 v1(1515,435) ; J2.48@1637.65,612.44 1674.56,612.44 v1(1675,612)
  Top Layer w9.84: U2.7@1312.84,907.9 U2.9@1312.84,954.16
  Top Layer w10: v1(1203.76,1856) 1204.45,1856.69 U29.2@1217,1856.69 ; v1(1293,1017) 1293,1019.94 U2.3@1293.16,1020.1 ; v4(1303,964) U2.9@1312.84,954.16
  Top Layer w12: R9.1@855,662.5 v3(855,722)
  Top Layer w14: C49.2@1636,1032 1699.62,1032 C52.1@1700,1032.38
  Top Layer w17.72: U7.9@674.4,2670.14 674.4,2717.4 v2(685,2728) ; v2(762.62,2380) 776.76,2394.14 U7.20@776.76,2437.86 ; v2(776.76,2722.01) U7.5@776.76,2670.14 776.76,2626.24 v2(792,2611) ; C173.2@778.38,2773 778.76,2772.62 C169.2@778.76,2724
  Top Layer w20: R9.1@855,662.5 R9.1@857.5,660
  Bottom Layer w6: C15.2@924,550.99 929.5,556.5 v1(937.5,556.5) ; C21.1@961,615.5 C21.1@967.5,622 ; v1(969,430.51) 969,429.22 984,414.22 984,388.76 R11.1@1005.76,367 1015.3,376.54 1015.3,403.25 1026.56,414.52 1075.51,414.52 C143.2@1089,428.01 ; R3.1@1102.76,365 1095,357.24 1095,306.62 1112.63,288.99 1137.99,288.99 1142.02,284.97 1142.02,225.07 1127.02,210.07 v1(1127.02,209.5)
  Bottom Layer w7: C163.1@306.6,577 319.33,564.28 341.72,564.28 v1(353,553) ; v1(1031.99,241) C13.2@1045.11,227.88 ; C7.2@1253,550.99 1253,552 v1(1264,563) ; v1(1284.5,335.49) C17.2@1285,335.99 ; C12.2@1285,373.01 1285,372 C12.2@1286,371
  Bottom Layer w8: C112.1@140,424 161,424 v1(169,416) ; v1(721,1748) 754,1748 765.75,1759.75 U25.B3@793.25,1759.75 ; U25.C1@824.75,1744 846,1744 v1(866,1724) ; v2(1041,879) 1053.8,866.2 U17.2@1062.06,866.2 ; v1(1388.62,407) 1416.62,379 R7.2@1416.62,355
  Bottom Layer w9.2: v7(874,2874) U27.9@903.53,2844.47
  Bottom Layer w9.84: U27.5@903.53,2818.88 U27.9@903.53,2844.47
  Bottom Layer w10: C146.2@911.01,401 C150.2@911.01,365 911.01,338.99 922.01,327.99 C9.2@937,327.99 ; D9.2@940,46 969,75 v1(955,89) 955,103 948,110 D1.2@940.53,110 ; v1(1031.99,493.5) 1057.38,493.5 1081.86,517.99 C144.2@1095,517.99 ; v1(1190.01,462.01) 1194.99,462.01 C8.2@1202.81,454.19 ; C17.2@1284.5,334.49 1291.99,326.99 C147.2@1323,326.99
  Bottom Layer w12: C112.1@130.39,436.23 138.16,444 158,444 v1(169,455) ; v1(821,970.59) C133.2@842.7,992.3 ; v1(961,578.99) C21.1@961,615.5 ; v1(1344.99,489) 1346,487.99 C19.2@1383,487.99
  Bottom Layer w17.72: C77.2@766,2908 766,2894 786,2874 v7(844.47,2874) ; S1.1@1045,58 1170.02,58 v1(1175.94,63.92)
  Bottom Layer w20: L36.1@127.5,657 138.5,668 C162.1@221.38,668
  other v1: 1154,174 1500,179 1599,179 1222,183.01 1500,219 1598,219 1345.61,226.48 97,238.42 1502,258 1598,258 1503,317 1598,317 1283,367 98,376 1598,376 1676,435 170,514 271,514 1064,552 1288,551.99 174,554 848.01,557 1389,565 1673,573 272,593 340,652 168,671 474,744 1381,818.5 528,940 477,960 1312.84,1017 1145,1736 1333,1814 623.22,2437.86
  other v2: 195,46.5 139,49.38 267,48.5 325,56.38 1119,670 1178.43,751.78 1176.99,880 1187,942.38 1106.5,944 1488.62,1000 1311.62,1057
  other v3: 218.38,345 1367.5,622 490,639 1359.62,677 1359.62,726 1166.62,805 726,930.5 1714,943.62 1724,965 1700,966 658.87,982.5
  other v4: 855.01,788
  other v7: 903.53,2874
  other v8: 519.76,806.22 567,806.22 614.24,806.22 519.76,833.78 567,833.78 614.24,833.78
"Green Power Good": J1.39 U31.4 | length 2403.6
  Top Layer w6.25: v1(1091,1817) 1111.19,1796.81 U31.4@1111.19,1755.68
  Signal Layer 1 w4: v1(170,534) 242,534 261,553 288,553 397,662 397,948 557,1108 968,1108 976,1116 976,1131 960,1147 911,1147 850.8,1207.2 850.8,1732.8 869.32,1751.32 902,1751.32 952.63,1801.96 1030.04,1801.96 1038,1794 1038,1732 1049.2,1720.8 1068.8,1720.8 1076,1728 1076,1802 v1(1091,1817)
"HV DISABLE": J1.40 R123.1 | length 4461.2
  Signal Layer 1 w4: v1(272,534) 385,534 412,561 412,714 495,797 495,928.5 576.5,1010 896,1010 954,952 954,896 1009,841 1436,841 1463,814 1621,814 1675,868 1675,1080.85 1671.8,1084.05 1671.8,1185.8 1750,1264 v1(1750,3082)
  Bottom Layer w6.25: R123.1@1672.88,2834.21 1725.14,2834.21 1750,2859.08 v1(1750,3082)
"HV FB": C200.1 C201.1 L2.2 Q2.3 R42.2 R200.1 | length 2183.8
  Signal Layer 2 w15: v4(53,3189) 569.98,3189 870.27,3489.29 1478.56,3489.29 1666.79,3301.05 1666.79,3039.21 v4(1710,2996)
  Bottom Layer w15: R42.2@1666,2996.39 1709.61,2996.39 v4(1710,2996)
  Bottom Layer w20: R42.2@1666,2996.39 R42.2@1666.39,2996